# Altium PCB PCB.PcbDoc
Units mm, origin at the board's own origin, x right, y up, seen from the top; angles counter-clockwise.
Board outline 100.08 x 45.96 mm, 2 copper layers (Top Layer, Bottom Layer); 16 components, 10 nets, 37 pads, 16 vias.
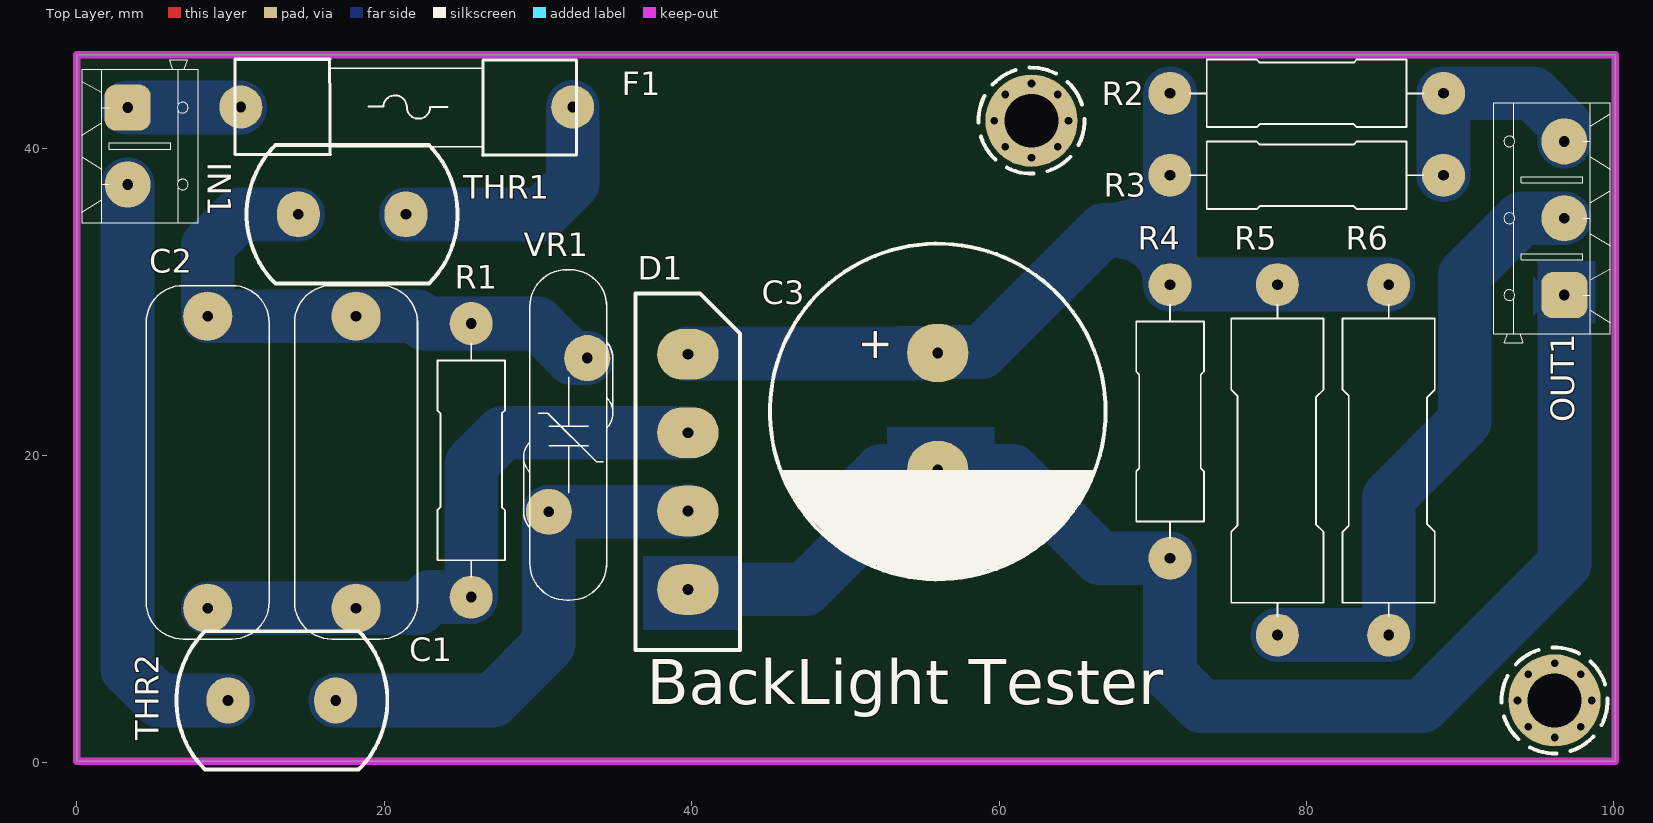
[diagram p0: Top Layer view]
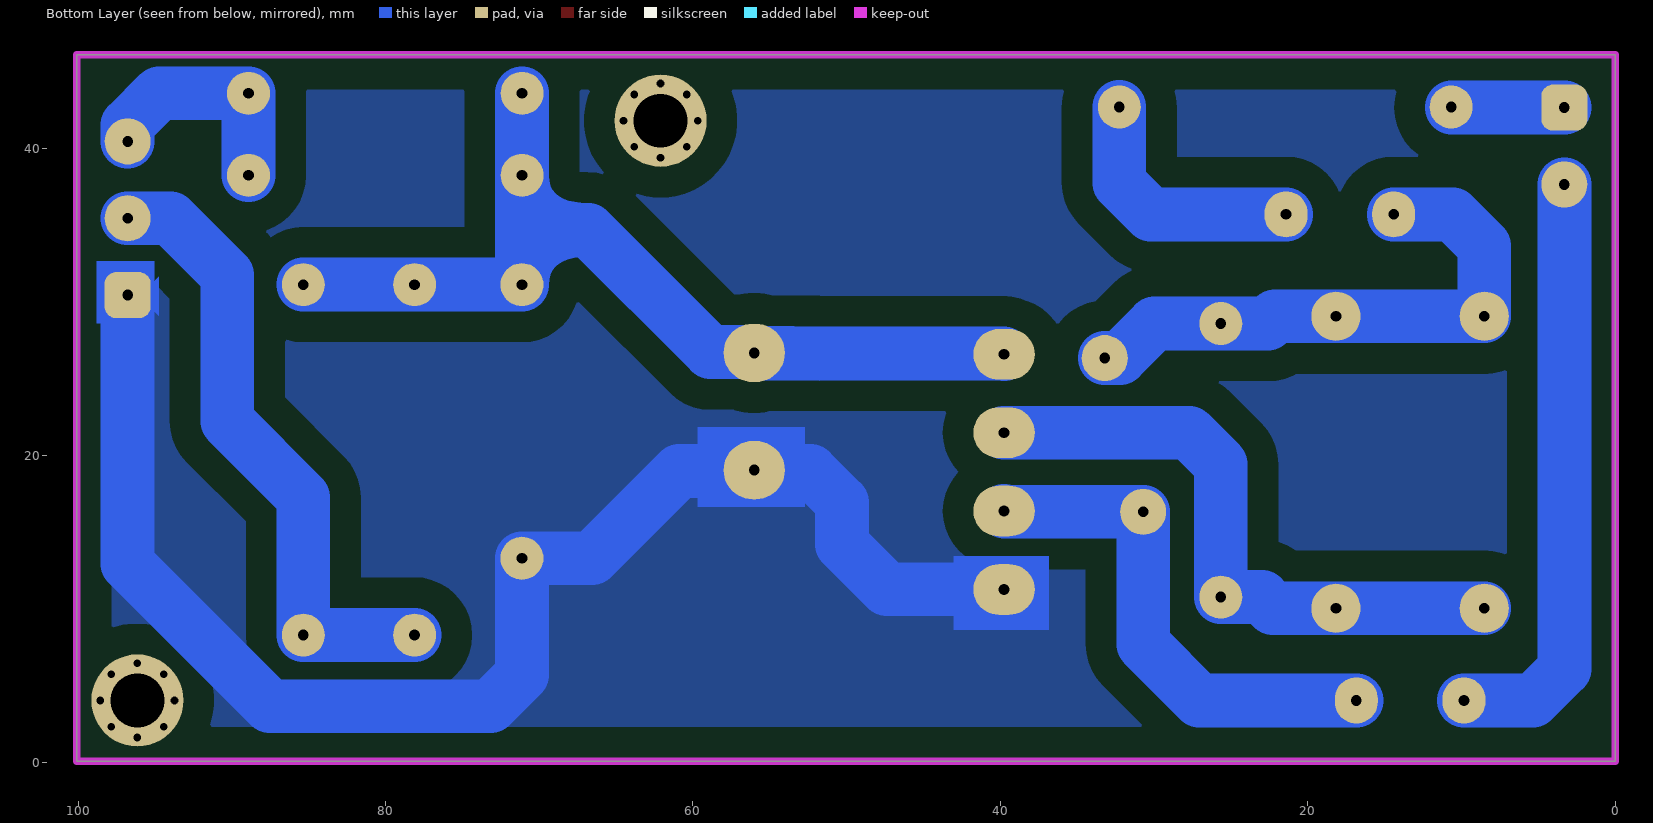
[diagram p1: Bottom Layer view, seen from below]
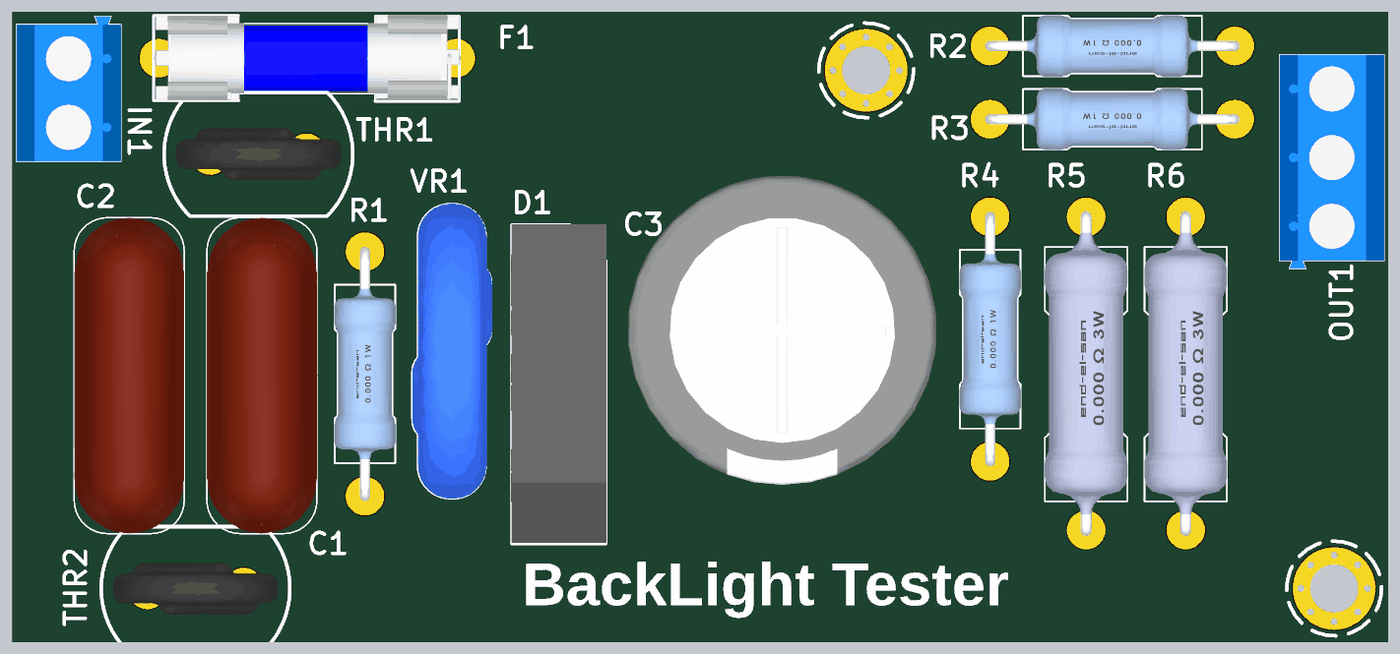
[diagram p2: 3D render of the assembled board from above, using the file's embedded part models]

## Layer stack, top to bottom
Top Solder: solder mask 0.0102, Solder Resist, Dk 3.5
Top Layer: signal copper 0.0356
Dielectric 1: dielectric 0.32, FR-4, Dk 4.8
Bottom Layer: signal copper 0.0356
Bottom Solder: solder mask 0.0102, Solder Resist, Dk 3.5

## Board outline
0,0.101 0,46.063 100.076,46.063 100.076,0.101

## Design rules (kind name [scope] priority, off if disabled: settings)
Clearance Clearance_1 [InPolygon] p1: gap=2 ignorepadtopadclearanceinfootprint=FALSE
Clearance [All] p2: gap=0.5 ignorepadtopadclearanceinfootprint=FALSE
PolygonConnect [All] p1: connectstyle=Relief reliefconductorwidth=0.254 reliefentries=4 polygonreliefangle="90 Angle" airgapwidth=0.254
RoutingVias [All] p1: holewidth=0.711 width=1.27 viastyle="Through Hole" minholewidth=0.711 minwidth=1.27 maxholewidth=0.711 maxwidth=1.27
SolderMaskExpansion [All] p1: expansion=0.102 istentingtop=FALSE
SupplyNets "Schematic Supply Nets" [InNet('GND')] p1: voltage=0.000
Width [All] p1: maxlimit=3.5 minlimit=2 preferedwidth=3
30 further rules are at their usual default settings.

## Components (designator, comment, footprint, x,y, rotation, side; value= is the part's Value field where it differs from the comment)
C1 "105J / 400V" CBB22 18.161,19.558 r270 top
C2 "474K / 400V" CBB22 8.509,19.558 r270 top
C3 "47uF / 400V" ELEC-CAP-RAD40-85 56.007,22.86 r90 top
D1 "Bridge Diode" KBU600 39.751,18.933 r270 top
F1 "2A" "FUSE-Double PAD" 21.463,42.672 r0 top
IN1 "KF301_Terminal" "KF301 2PIN" 3.302,40.132 r270 top
OUT1 "KF301-3Pin Terminal" "KF301 3PIN" 96.774,35.433 r90 top
R1 "470K" "Axial 1W  7_0mm" 25.654,19.685 r90 top
R2 "470K" "Axial 1W  7_0mm" 80.01,43.561 r180 top
R3 "470K" "Axial 1W  7_0mm" 80.01,38.227 r180 top
R4 "470K" "Axial 1W  7_0mm" 71.12,22.215 r90 top
R5 "470R" "Axial 3W 9_0mm" 78.105,19.715 r90 top
R6 "470R" "Axial 3W 9_0mm" 85.344,19.715 r90 top
THR1 "30K" NTC_10mm 17.907,35.687 r180 top
THR2 "30K" NTC_10mm 13.335,4.064 r0 top
VR1 "271K" "20D XXX" 32.004,21.336 r270 top value=xxDxxx

## Footprints (in the part's own frame and the unit in brackets; to place one, negate y for a bottom-side part, rotate by r counter-clockwise, add the part's x,y. Pads: shape width x height; smd on the part's side, far side on the other; paste and mask are expansions set on the pad)
"20D XXX" [mm] "MOV-20DxxxK Metal Oxide Varistors (MOVs) are 20 mm-Design:Abbas Basereh"
  round 3 hole 0.7: 1(5,-1.3) 2(-5,1.2)
  silkscreen extent -10.75,-2.93 10.75,2.87, body extent -10.76,-2.9 10.74,2.9, height 25.5
"Axial 1W  7_0mm" [mm] "Designer Abbas Basereh"
  round 2.8 hole 0.7: 1(8.9,0) 2(-8.9,0)
  silkscreen extent -7.6,-2.2 7.6,2.2, body extent -9.26,-2.25 9.27,2.25, height 5.22
"Axial 3W 9_0mm" [mm] "Designer Abbas Basereh"
  round 2.8 hole 0.7: 1(11.4,0) 2(-11.4,0)
  silkscreen extent -10.2,-3 10.1,3, body extent -11.83,-3.01 11.84,3.01, height 6.73
CBB22 [mm] "W23_0_H14_5_T8_0_P19"
  round 3.2 hole 0.7: 1(-9.5,0) 2(9.5,0)
  silkscreen extent -11.5,-4 11.5,4, body extent -11.5,-4 11.5,4, height 19.5
ELEC-CAP-RAD40-85 [mm]
  oval 3.8x4 hole 0.7: 1(-3.81,0) 2(3.81,0)
  silkscreen extent -10.92,-10.92 10.92,10.92, body extent -11.25,-11.25 11.25,11.25, height 37.46
"FUSE-Double PAD" [mm]
  round 2.8 hole 0.7: 1(-10.795,0) 2(10.795,0)
  silkscreen extent -11.18,-3.15 11.05,3.12, body extent -11.02,-3.08 11.07,3.17, height 9.6
KBU600 [mm]
  oval 3.3x4 hole 0.7: 1(-7.65,0) 2(-2.55,0) 3(7.65,0) 4(2.55,0)
  silkscreen extent -11.6,-3.4 11.6,3.4, body extent -11.64,-3.49 11.56,3.46, height 26.65
"KF301 2PIN" [mm] "Designer Abbas Basereh"
  rrect50% 3x3 hole 0.7: 1(-2.5,0)
  round 3 hole 0.7: 2(2.5,0)
  silkscreen extent -5.6,-3 5,4.6, body extent -5.6,-3 5,4.6, height 10
"KF301 3PIN" [mm] "Designer Abbas Basereh"
  rrect50% 3x3 hole 0.7: 1(-5,0)
  round 3 hole 0.7: 2(0,0) 3(5,0)
  silkscreen extent -8.1,-3 7.5,4.6, body extent -8.1,-3 7.5,4.6, height 10
NTC_10mm [mm]
  oval 2.8x3 hole 0.7: 1(-3.5,0) 2(3.5,0)
  silkscreen extent -6.86,-4.5 6.86,4.5, body extent -6,-1.9 6,1.9, height 13

## Part data
C1 C2: library part "Cap CBB22 105J400V", "Polypropylene film with epoxy Cap CBB22 105J400V", Manufacturer=CHINA, Data=16-12-2016, designer="Abbas Basereh", Link=https://www.alibaba.com/product-detail/CBB22-capacitors-105J-400V-1UF-400V_60020643516.html, Part. No=105J400V
C3: library part "Capacitor Electrolytic", "Electrolytic Capacitor"
D1: "Full Wave Bridge Diode", MODEL=KA
F1: library part Fuse, "Fuse"
IN1: library part KF301-2Pin_Terminal, "Terminal 2 Pin 250VAC 16A", designer="Abbas Basereh", Link=https://www.aliexpress.com/item/, Part. No="KF301 2P"
OUT1: "Terminal 3 Pin 250VAC 16A", designer="Abbas Basereh", Link=https://www.aliexpress.com/item/, Part. No="KF301 3P"
R1 R2 R3 R4: library part "RES Axial 1W", "RES Axial 1W", Data=4-1-2017, Desc.="RES Axial 1W", designer="Abbas Basereh"
R5 R6: library part "RES Axial 3W", "RES Axial 3W", Data=4-1-2017, Desc.="RES Axial 3W", designer="Abbas Basereh"
THR1 THR2: library part NTC, "NTC"
VR1: library part "VARISTOR (VDR)", "VARISTORS", Manufacturer=china-canada-philipina, Data=2017-1-5, designer="Abbas Basereh", Link=digikey.com, Models=MOV-VDR-COV, Publisher="ABBAS BASEREH"

## Free pads (board coordinates)
  round 6 hole 3.5: 2(62.103,41.783) 2(96.139,4.064)

## Via types
v1: diameter 1, hole 0.5, Top Layer to Bottom Layer, 16 vias

## Nets (pads, with @x,y where several pads share a name; then routed paths per layer and width w, separated by ;. In a path a pad name is that pad's centre, name@x,y a point inside that pad or via, vN(x,y) a via of type N, cw(c..) or ccw(c..) an arc to the next point about the centre after c; other vN are vias at no path point)
GND: C3.1 D1.3 OUT1.1 R4.2 | length 94
  Bottom Layer w3.5: D1.3 39.771,11.303 47.371,11.303 50.292,14.224 50.292,16.942 52.342,18.993 55.95,18.993 C3.1 56.064,18.993 60.89,18.993 66.568,13.315 R4.2 71.12,5.733 73.17,3.683 87.503,3.683 96.774,12.954 OUT1.1
NetC1_1: C1.1 C2.1 R1.1 THR1.2 VR1.2 | length 37.1
  Bottom Layer w3.5: THR1.2 10.559,35.687 8.509,33.637 C2.1 C1.1 22.123,29.058 22.596,28.585 R1.1 29.962,28.585 32.211,26.336 VR1.2
NetC1_2: C1.2 C2.2 D1.2 R1.2 | length 41
  Bottom Layer w3.5: C2.2 C1.2 22.25,10.058 22.977,10.785 R1.2 25.654,19.433 27.704,21.483 D1.2
NetC3_2: C3.2 D1.1 R2.1 R3.1 R4.1 R5.1 R6.1 | length 61.4
  Bottom Layer w3.5: D1.1 39.795,26.626 55.963,26.626 56.064,26.727 58.858,26.727 66.802,34.671 71.12,34.671 ; R2.1 R3.1 cw(c71.086,38.203) 71.12,38.203 71.12,34.671 ; R6.1 R5.1 R4.1 71.12,34.671
NetD1_4: D1.4 THR2.2 VR1.1 | length 33.1
  Bottom Layer w3.5: THR2.2 27.051,4.064 30.704,7.717 VR1.1 39.704,16.336 D1.4
NetF1_1: F1.1 IN1.1 | length 7.3
  Bottom Layer w3.5: IN1.1 F1.1@10.628,42.632
NetF1_2: F1.2 THR1.1 | length 16.6
  Bottom Layer w3.5: THR1.1 30.208,35.687 32.258,37.737 F1.2
NetIN1_2: IN1.2 THR2.1 | length 38.9
  Bottom Layer w3.5: IN1.2 3.302,6.114 5.352,4.064 THR2.1
NetOUT1_2: OUT1.2 R5.2 R6.2 | length 40.7
  Bottom Layer w3.5: R5.2 R6.2 85.344,17.272 90.297,22.225 90.297,31.75 93.98,35.433 OUT1.2
NetOUT1_3: OUT1.3 R2.2 R3.2 | length 15.1
  Bottom Layer w3.5: R3.2 R2.2 94.724,43.561 96.774,41.511 OUT1.3
copper on no net:
  other v1: 96.139,1.651 94.433,2.358 97.845,2.358 93.726,4.064 98.552,4.064 94.433,5.77 97.845,5.77 96.139,6.477 62.103,39.37 60.397,40.077 63.809,40.077 59.69,41.783 64.516,41.783 60.397,43.489 63.809,43.489 62.103,44.196

## Polygon pours and split planes (outlines as drawn)
GND on Bottom Layer "GND_L02_P000" (solid, pour order 0): 0,46.101 100.076,46.101 100.076,0 0,0

## Keep-outs
Keep-Out Layer:
  the board outline again, w0.5

## Other copper
Bottom Layer:
  rectangle net GND: 95.011,28.575 98.806,32.639
  rectangle net GND: 36.83,8.636 43.053,13.462
  rectangle net GND: 52.705,16.637 59.69,21.844
  region net GND: 94.742,31.623 95.25,31.115 95.25,29.464 95.123,29.464 94.742,29.083

## Silkscreen, mask and mechanical layers (free items; w line width, h text height)
Top Overlay:
  lines w0.254: 58.655,41.655 cw(c62.103,41.783) 59.044,43.379 ; 58.812,40.749 ccw(c62.103,41.783) 59.755,39.255 ; 59.575,44.131 cw(c62.103,41.783) 61.069,45.074 ; 60.507,38.724 ccw(c62.103,41.783) 62.231,38.335 ; 61.975,45.231 cw(c62.103,41.783) 63.699,44.842 ; 63.137,38.492 ccw(c62.103,41.783) 64.631,39.435 ; 64.451,44.311 cw(c62.103,41.783) 65.394,42.817 ; 92.691,3.936 cw(c96.139,4.064) 93.08,5.66 ; 92.848,3.03 ccw(c96.139,4.064) 93.791,1.536 ; 93.611,6.412 cw(c96.139,4.064) 95.105,7.355 ; 94.543,1.005 ccw(c96.139,4.064) 96.267,0.616 ; 96.011,7.512 cw(c96.139,4.064) 97.735,7.123 ; 97.173,0.773 ccw(c96.139,4.064) 98.667,1.716 ; 98.487,6.592 cw(c96.139,4.064) 99.43,5.098 ; 65.162,40.187 ccw(c62.103,41.783) 65.551,41.911 cw(c62.103,41.783) 65.162,40.187 ; 99.198,2.468 ccw(c96.139,4.064) 99.587,4.192 cw(c96.139,4.064) 99.198,2.468
  text "BackLight Tester" at 37.084,2.849 h5

## Text inside footprints (layer, text, board x,y; h text height)
C3: Top Overlay "+" at 52.832,26.035 h2.03 r90